# Altium PCB PCB_BalanceCar_2_2022-06-02.pcbdoc
Units mm, origin at the board's own origin, x right, y up, seen from the top; angles counter-clockwise.
Board outline 106.22 x 122.66 mm, 2 copper layers (Top Layer, Bottom Layer); 22 components, 23 nets, 111 pads, 10 vias.
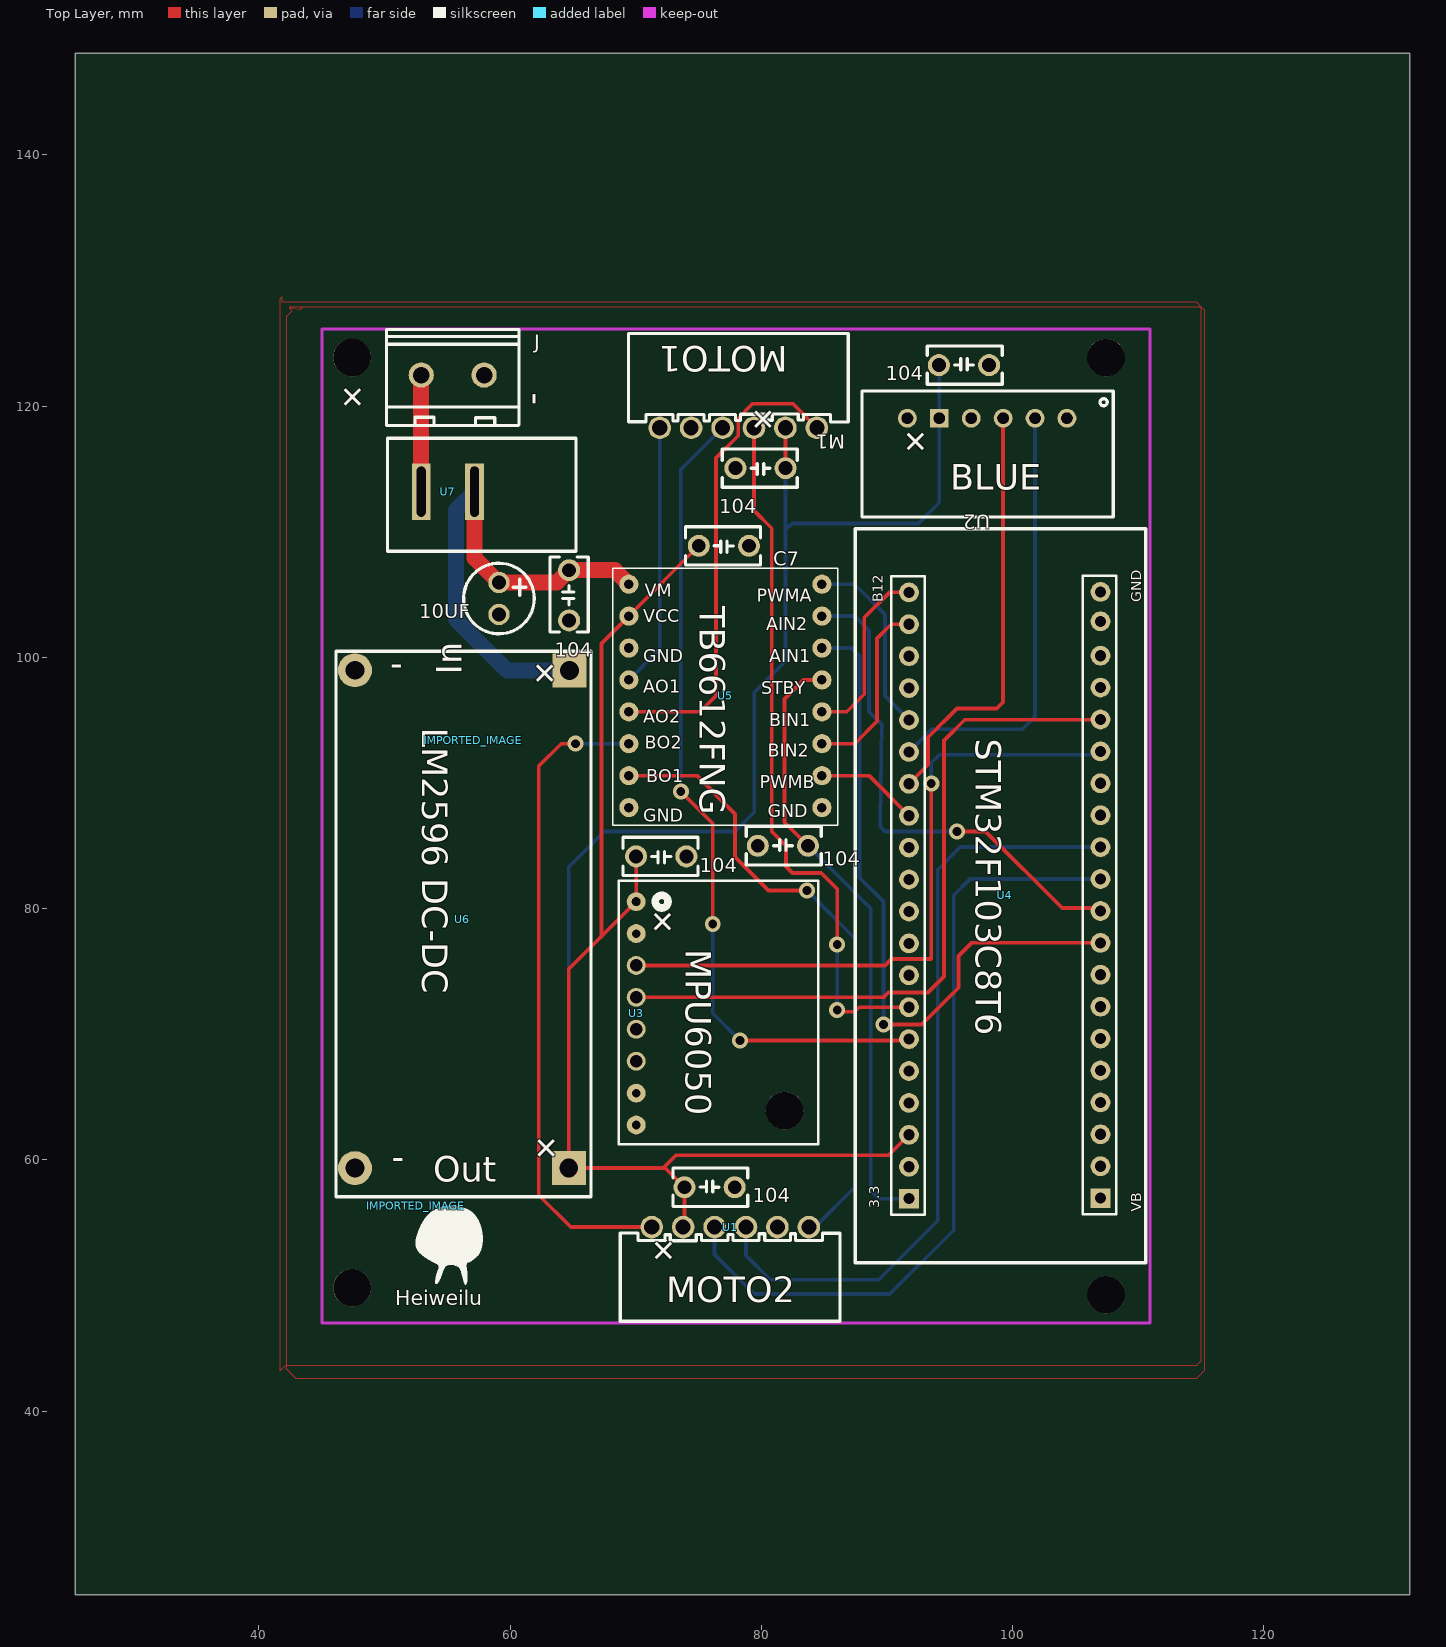
[diagram p0: Top Layer view]
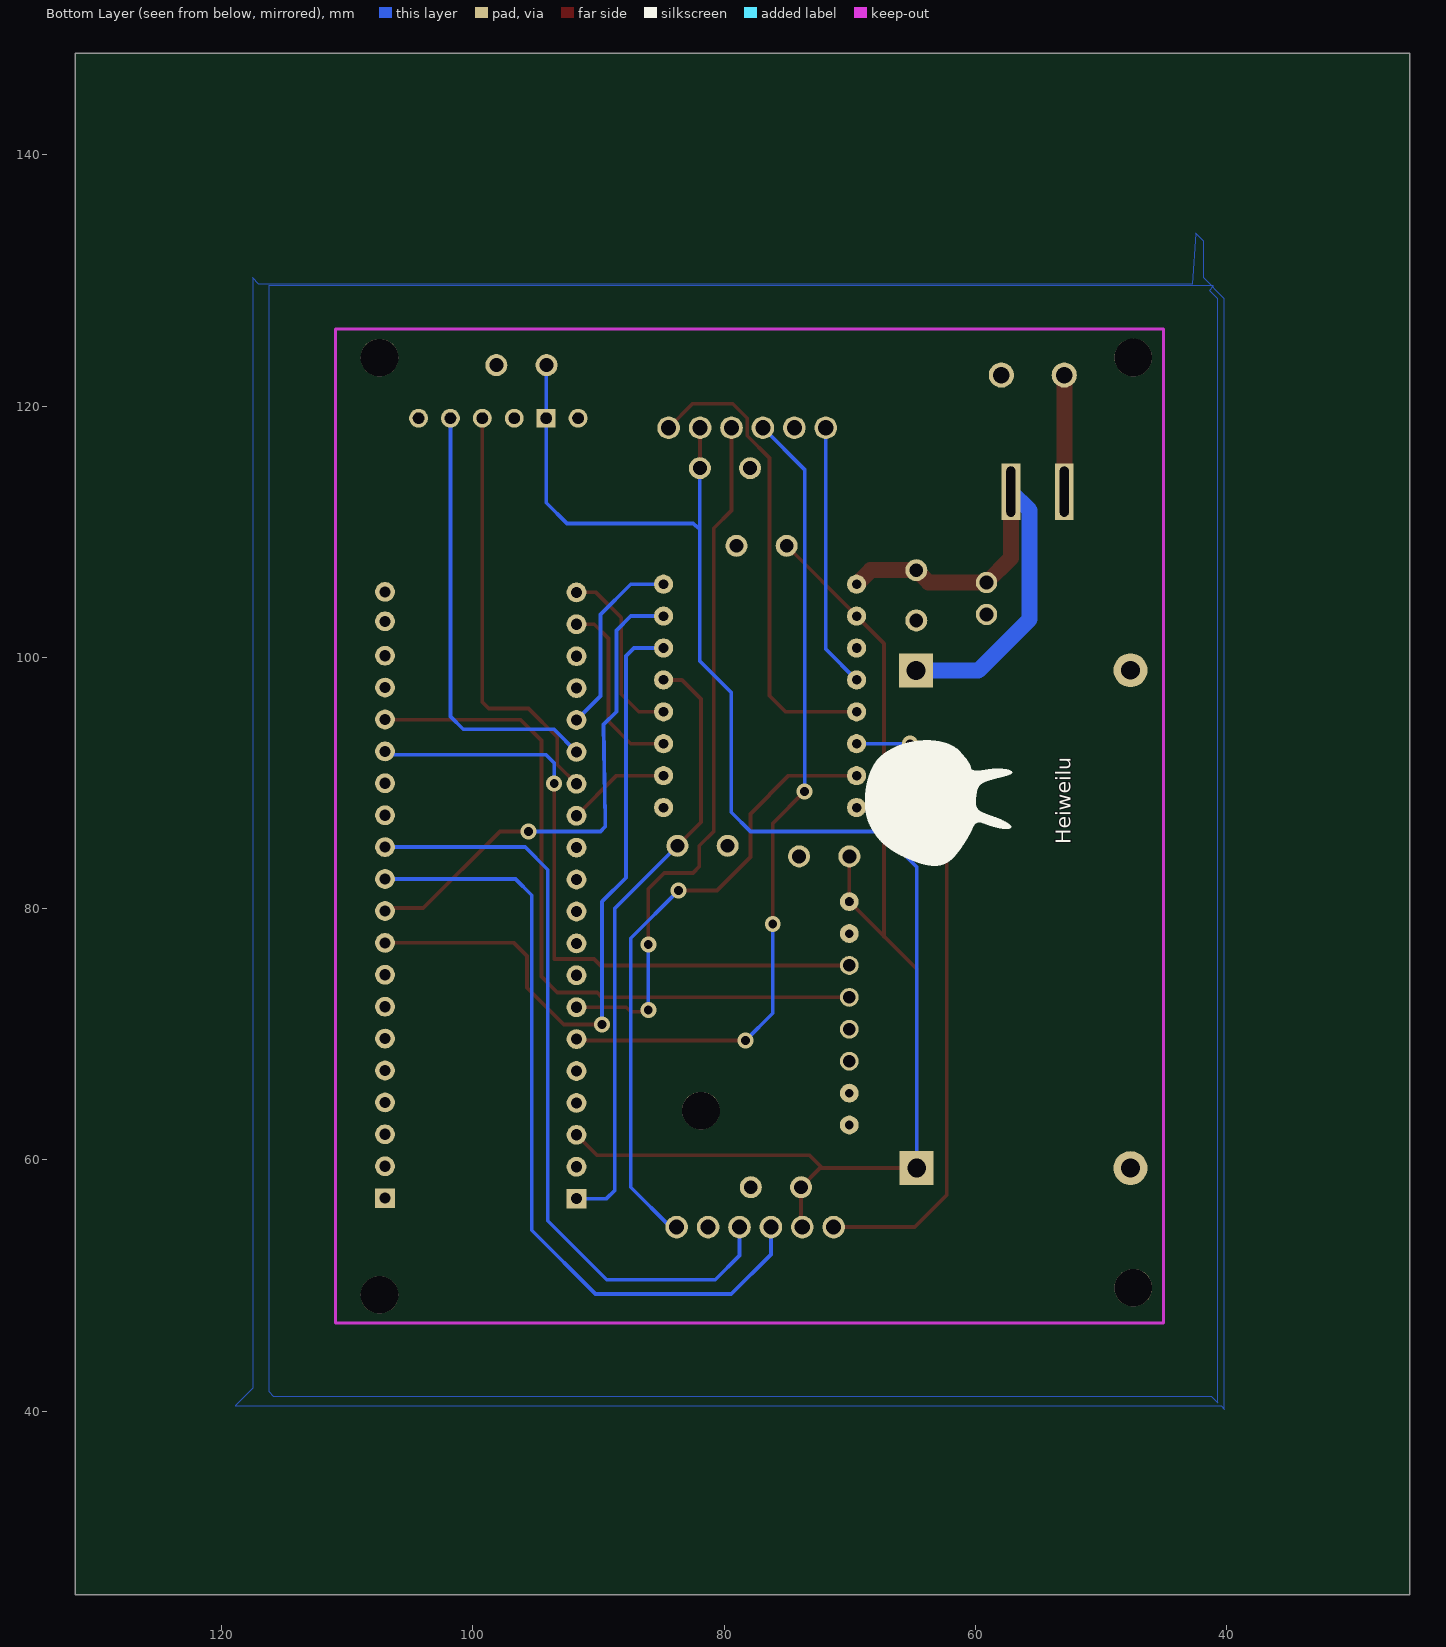
[diagram p1: Bottom Layer view, seen from below]

## Layer stack, top to bottom
Top Layer: signal copper (thickness not stored)
Dielectric: dielectric 0.32, FR-4, Dk 4.8
Bottom Layer: signal copper (thickness not stored)

## Board outline
131.623,25.4 25.4,25.4 25.4,148.062 131.623,148.062

## Components (designator, comment, footprint, x,y, rotation, side; value= is the part's Value field where it differs from the comment)
10UF "10uf" 10UF电解电容 59.106,104.681 r270 top
104 "0.1uf" 104低压瓷片电容（引脚4MM） 79.924,115.055 r0 top
104 "0.1uf" 104低压瓷片电容（引脚4MM） 75.87,57.818 r180 top
104 "0.1uf" 104低压瓷片电容（引脚4MM） 72.024,84.155 r0 top
104 "0.1uf" 104低压瓷片电容（引脚4MM） 96.124,123.255 r180 top
104 "0.1uf" 104低压瓷片电容（引脚4MM） 64.694,104.935 r270 top
104 "0.1uf" 104低压瓷片电容（引脚4MM） 81.712,84.996 r180 top
C7 "0.1uf" 104低压瓷片电容（引脚4MM） 77.013,108.872 r0 top
IMPORTED_IMAGE "IMPORTED_IMAGE" IMPORTED_IMAGE 57.076,93.384 r0 top
IMPORTED_IMAGE "IMPORTED_IMAGE" IMPORTED_IMAGE 52.475,56.339 r0 top
J "电源接口" CONN-TH_2P-P5.00_WJ301V-5.00-2P 55.423,122.461 r180 top
M1 "MOTO1" CONN-TH_XH-6AW 78.156,118.27 r180 top
U1 "MOTO2" CONN-TH_XH-6AW 77.521,54.643 r0 top
U2 "BLUE" 蓝牙 104.318,113.317 r180 top
U3 "MPU6050" MPU6050_____Ģ__ 68.631,61.247 r0 top
U4 "STM32F103C8T6" STM32F103C8T6最小系统 99.365,81.059 r90 top
U5 "TB6612FNG" TB6612FNG 76.817,97.184 r0 top
U6 "LM2596 DC-DC" LM2596-MODULE 56.185,79.154 r270 top
U7 "船型开关" 船型开关 55.042,113.19 r0 top
? "" ? 77.422,129.585 r0 top
? "" ? 42.819,86.858 r0 top
? "" ? 77.422,43.984 r0 top

## Footprints (in the part's own frame and the unit in brackets; to place one, negate y for a bottom-side part, rotate by r counter-clockwise, add the part's x,y. Pads: shape width x height; smd on the part's side, far side on the other; paste and mask are expansions set on the pad)
10UF电解电容 [mm]
  round 1.7 hole 1.1: 1(-1.27,0) 2(1.27,0)
  silkscreen extent -2.81,-2.81 2.81,2.81
104低压瓷片电容（引脚4MM） [mm]
  round 1.75 hole 1.1: 1(-2,0) 2(2,0)
  silkscreen extent -3.05,-1.52 2.92,1.52
CONN-TH_2P-P5.00_WJ301V-5.00-2P [mm]
  round 2 hole 1.3: 1(-2.504,0) 2(2.504,0)
  silkscreen extent -5.27,-3.62 5.26,4.01
CONN-TH_XH-6AW [mm]
  round 1.8 hole 1.199: 1(6.251,0) 2(3.749,0) 3(1.25,0) 4(-1.25,0) 5(-3.749,0) 6(-6.251,0)
  silkscreen extent -8.76,-7.49 8.73,-0.46
IMPORTED_IMAGE [mm]
LM2596-MODULE [mm]
  rect 2.7x2.7 hole 1.5: 1(-19.784,8.54) 3(19.814,8.481)
  round 2.7 hole 1.5: 2(-19.815,-8.54) 4(19.815,-8.535)
  silkscreen extent -21.33,-10.06 22.1,10.26
MPU6050_____Ģ__ [mm]
  round 1.5 hole 0.68 slot 0.685 at 90 deg: 1(1.397,19.304)
  round 1.5 hole 0.68: 2(1.397,16.764) 7(1.397,4.064) 8(1.397,1.524)
  round 1.5 hole 1: 3(1.397,14.224) 4(1.397,11.684) 5(1.397,9.144) 6(1.397,6.604)
  silkscreen extent 0,0 15.88,20.95
STM32F103C8T6最小系统 [mil]
  round 62 hole 35: 1(949.2,300) 2(849.2,300) 3(749.2,300) 4(649.2,300) 5(549.2,300) 6(449.2,300) 7(349.2,300) 8(249.2,300) 9(149.2,300) 10(49.2,300) 11(-50.8,300) 12(-150.8,300) 13(-250.8,300) 14(-350.8,300) 15(-450.8,300) 16(-550.8,300) 17(-650.8,300) 18(-750.8,300) 19(-850.8,300) 22(-849.2,-300) 23(-749.2,-300) 24(-649.2,-300) 25(-549.2,-300) 26(-449.2,-300) 27(-349.2,-300) 28(-249.2,-300) 29(-149.2,-300) 30(-49.2,-300) 31(50.8,-300) 32(150.8,-300) 33(250.8,-300) 34(350.8,-300) 35(450.8,-300) 36(550.8,-300) 37(650.8,-300) 38(750.8,-300) 39(858.4,-300) 40(950.8,-300)
  rect 62x62 hole 35: 20(-950.8,300) 21(-949.2,-300)
  silkscreen extent -1152,-442 1148,468
TB6612FNG [mil]
  round 60 hole 30: 1(-290,340) 2(-290,240) 3(-290,140) 4(-290,40) 5(-290,-60) 6(-290,-160) 7(-290,-260) 8(-290,-360) 9(315,-360) 10(315,-260) 11(315,-160) 12(315,-60) 13(315,40) 14(315,140) 15(315,240) 16(315,340)
  silkscreen extent -340,-415 365,390
船型开关 [mm]
  rect 1.5x4.5 hole 0.7 slot 4 at 90 deg: 1(-2.125,0) 2(2.125,0)
  silkscreen extent -4.8,-4.75 10.2,4.25
蓝牙 [mm]
  round 1.5 hole 0.9 slot 0.905 at 0 deg: 1(0,-5.715) 2(2.54,-5.715) 3(5.08,-5.715) 4(7.62,-5.715) 6(12.7,-5.715)
  rect 1.5x1.5 hole 0.9 slot 0.905 at 0 deg: 5(10.16,-5.715)
  silkscreen extent -3.68,-7.87 16.32,2.16
? [mm]

## Free pads (board coordinates)
  round 3 hole 3 unplated: ""(47.422,49.817) ""(47.422,123.858) ""(81.839,63.914) ""(107.424,49.255) ""(107.424,123.855)

## Via types
v1: diameter 1.27, hole 0.7, Top Layer to Bottom Layer, tented both sides, 10 vias

## Nets (pads, with @x,y where several pads share a name; then routed paths per layer and width w, separated by ;. In a path a pad name is that pad's centre, name@x,y a point inside that pad or via, vN(x,y) a via of type N, cw(c..) or ccw(c..) an arc to the next point about the centre after c; other vN are vias at no path point)
3.3V: 104.1@83.712,84.996 U4.20 U5.13 | length 48.9
  Top Layer w0.3: 104.1@83.711,84.996 81.839,86.868 81.839,96.68 83.358,98.199 U5.13
  Bottom Layer w0.3: 104.1@83.712,84.996 88.697,80.011 88.697,57.564 89.352,56.909 U4.20
+5V: 104.1@70.024,84.155 104.2@73.87,57.818 104.2@81.924,115.055 104.2@94.124,123.255 C7.1 M1.5 U1.5 U2.5 U3.1 U4.18 U5.2 U6.3 | length 191.6
  Top Layer w0.3: U6.3 72.349,59.34 104.2@73.871,57.818 ; U6.3 64.666,75.19 U3.1 70.028,84.152 104.1@70.024,84.155 ; 67.259,77.783 67.259,101.087 U5.2 ; U5.2 69.45,103.31 C7.1 ; 72.187,59.342 72.184,59.34 73.203,60.358 90.114,60.358 U4.18 ; U1.5 73.87,54.741 104.2@73.87,57.818 ; M1.5@81.924,118.255 81.924,115.041 104.2@81.943,115.041
  Bottom Layer w0.3: U6.3 64.666,83.318 67.488,86.139 77.902,86.139 79.426,87.663 79.426,97.188 81.925,99.688 104.2@81.925,115.055 ; 81.925,109.954 81.925,110.231 82.474,110.65 92.507,110.65 94.158,112.301 U2.5 94.158,123.221 104.2@94.124,123.255
AO1: M1.1 U5.4 | length 21.1
  Bottom Layer w0.3: U5.4 71.905,100.654 M1.1
AO2: M1.6 U5.5 | length 37.8
  Top Layer w0.3: U5.5 75.103,95.659 76.378,96.934 76.378,115.857 78.156,117.635 78.156,119.032 79.299,120.175 82.502,120.175 M1.6
BAT+: J.2 U7.1 | length 9.3
  Top Layer w1.27: U7.1 52.917,122.46 J.2
BO1: U1.1 U5.7 | length 50.1
  Top Layer w0.3: U5.7 74.859,90.579 77.902,87.536 77.902,84.107 80.569,81.44 v1(83.617,81.44)
  Bottom Layer w0.3: v1(83.617,81.44) 87.427,77.63 87.427,57.818 84.252,54.643 U1.1
BO2: U1.6 U5.6 | length 52.5
  Top Layer w0.3: v1@64.821,92.997 64.948,93.124 v1(65.202,93.124) 64.059,93.124 62.281,91.346 62.281,57.183 64.821,54.643 U1.6
  Bottom Layer w0.3: v1(65.202,93.124) 69.45,93.124 U5.6
GND: 10UF.2 104.1@77.87,57.818 104.1@77.924,115.055 104.1@98.124,123.255 104.2@64.694,102.936 104.2@74.024,84.155 104.2@79.712,84.996 C7.2 J.1 M1.2 U1.2 U2.4 U3.2 U4.19 U5.8 U6.2 U6.4
PA4: U4.29 U5.14 | length 54.8
  Top Layer w0.3: v1(89.713,70.772) 92.761,70.772 95.682,73.693 95.682,76.233 96.718,77.27 U4.29
  Bottom Layer w0.3: U5.14 87.178,100.739 87.808,100.109 87.808,82.456 89.713,80.551 v1(89.713,70.772)
PA5: U4.30 U5.15 | length 40.6
  Top Layer w0.3: v1(95.555,86.139) 97.841,86.139 103.937,80.043 106.751,80.043 U4.30
  Bottom Layer w0.3: U5.15 87.432,103.279 88.57,102.141 88.57,95.664 89.586,94.648 89.459,87.028 89.459,86.52 89.84,86.139 v1(95.555,86.139)
PA6: U1.4 U4.31 | length 63.5
  Bottom Layer w0.3: U1.4 76.271,52.464 79.426,49.309 90.221,49.309 95.301,54.389 95.301,81.059 96.591,82.35 U4.31
PA7: U1.3 U4.32 | length 61.9
  Bottom Layer w0.3: U1.3 78.77,52.378 80.696,50.452 89.332,50.452 94.031,55.151 94.031,83.091 95.829,84.89 U4.32
PA9: U2.2 U4.6 | length 34.9
  Bottom Layer w0.3: U4.6 93.543,94.267 100.762,94.267 101.778,95.283 U2.2
PA10: U2.3 U4.7 | length 34.1
  Top Layer w0.3: U4.7 93.269,91.453 93.269,93.632 95.555,95.918 98.73,95.918 99.238,96.426 U2.3
PB6: M1.4 U4.14 | length 56.6
  Top Layer w0.3: M1.4 79.405,111.687 80.823,110.269 80.823,86.139 81.966,84.996 81.966,83.345 82.474,82.837 84.76,82.837 86.03,81.567 v1(86.03,77.145) v1@86.03,76.868 ; v1(86.03,71.915) 86.157,71.788 87.427,71.788 87.787,72.149 U4.14
  Bottom Layer w0.3: v1(86.03,71.915) v1@86.03,77.122
PB7: M1.3 U4.15 | length 65.6
  Top Layer w0.3: v1(73.584,89.314) 76.124,86.774 v1(76.124,78.773) ; v1(78.283,69.502) 91.638,69.502 U4.15
  Bottom Layer w0.3: v1(73.584,89.314) 73.584,114.948 M1.3 ; v1(76.124,78.773) 76.124,71.661 v1(78.283,69.502)
PB10: U3.3 U4.35 | length 53.2
  Top Layer w0.3: U3.3 89.84,75.471 90.348,75.979 93.523,75.979 v1(93.523,89.949)
  Bottom Layer w0.3: v1(93.523,89.949) 93.523,91.6 94.158,92.235 106.71,92.235 U4.35
PB11: U3.4 U4.36 | length 57.1
  Top Layer w0.3: U3.4 89.713,72.931 90.094,73.312 93.269,73.312 94.539,74.582 94.539,93.378 96.19,95.029 U4.36
PB12: U4.1 U5.12 | length 14.4
  Top Layer w0.3: U5.12 86.787,95.659 88.189,97.061 88.189,103.157 90.2,105.169 U4.1
PB13: U4.2 U5.11 | length 14.7
  Top Layer w0.3: U5.11 87.422,93.119 89.205,94.902 89.205,101.506 90.327,102.629 U4.2
PWMA: U4.5 U5.16 | length 15.2
  Bottom Layer w0.3: U5.16 87.432,105.819 89.84,103.411 89.84,96.914 U4.5
PWMB: U4.8 U5.10 | length 8.2
  Top Layer w0.3: U5.10 88.555,90.579 U4.8
VM: 10UF.1 104.1@64.694,106.936 U5.1 U6.1 U7.2 | length 40.8
  Top Layer w1.27: U7.2 57.167,107.891 10UF.1 63.711,105.952 64.694,106.935 68.335,106.935 U5.1
  Bottom Layer w1.27: U7.2 55.677,111.699 55.677,103.03 59.769,98.939 U6.1@64.727,98.939
pads on no net: U2.1 U2.6 U3.5 U3.6 U3.7 U3.8 U4.3 U4.4 U4.9 U4.10 U4.11 U4.12 U4.13 U4.16 U4.17 U4.21 U4.22 U4.23 U4.24 U4.25 U4.26 U4.27 U4.28 U4.33 U4.34 U4.37 U4.38 U4.39 U4.40 U5.3 U5.9

## Polygon pours and split planes (outlines as drawn)
GND on Bottom Layer (solid): 42.723,129.7 117.018,129.7 117.526,130.208 117.526,41.816 118.923,40.419 40.437,40.419 40.183,40.165 40.183,128.557 41.834,130.208 41.834,133.129 42.469,133.764
GND on Bottom Layer (solid): 41.072,129.573 116.256,129.573 116.256,41.562 115.875,41.181 41.199,41.181 40.691,40.673 40.691,128.557 41.326,129.192
GND on Top Layer (solid): 43.485,127.922 43.247,127.684 42.469,127.795 42.596,127.922 43.485,127.922
GND on Top Layer (solid): 42.469,127.922 114.986,127.922 115.24,127.668 115.24,43.213 114.605,42.578 42.977,42.578 42.215,43.34 42.215,127.16 42.596,127.541
GND on Top Layer (solid): 41.834,128.303 114.605,128.303 114.986,127.922 114.986,43.975 114.605,43.594 42.088,43.594 41.707,43.213 41.707,128.557 41.834,128.684

## Silkscreen, mask and mechanical layers (free items; w line width, h text height)
Top Overlay:
  text "MOTO1" at 82.093,124.747 h2.03 r180
  text "+" at 48.902,120.513 h2.03 r135
  text "+" at 80.358,120.386 h2.03 r225
  text "-" at 62.662,120.048 h2.03 r90
  text "+" at 93.733,116.957 h2.03 r135
  text "BLUE" at 95.047,113.317 h2.03
  text "TB6612FNG" at 75.108,104.046 h2.03 r270
  text "LM2596 DC-DC" at 53.01,94.394 h2.03 r270
  text "STM32F103C8T6" at 97.079,93.505 h2.03 r270
  text "+" at 72.357,80.381 h2.03 r225
  text "MPU6050" at 73.965,76.741 h2.03 r270
  text "+" at 73.667,52.568 h2.03 r135
  text "MOTO2" at 72.441,48.674 h2.03
  text "Heiweilu" at 50.851,48.039 h2.03
Bottom Overlay:
  text "Heiweilu" at 51.994,85.123 h2.03 r270

## Text inside footprints (layer, text, board x,y; h text height)
U4: Top Overlay "3.3" at 89.394,56.127 h0.8 r90; Top Overlay "VB" at 110.222,55.873 h0.8 r90; Top Overlay "B12" at 89.648,104.387 h0.8 r90; Top Overlay "GND" at 110.222,104.387 h0.8 r90
U5: Top Overlay "BO1" at 70.847,90.072 h1.02; Top Overlay "BO2" at 70.72,92.739 h1.02; Top Overlay "VM" at 70.72,104.804 h1.02; Top Overlay "AIN2" at 80.372,102.137 h1.02; Top Overlay "AIN1" at 80.626,99.597 h1.02; Top Overlay "BIN1" at 80.626,94.517 h1.02; Top Overlay "BIN2" at 80.499,92.104 h1.02; Top Overlay "PWMB" at 79.864,89.564 h1.02; Top Overlay "GND" at 80.499,87.278 h1.02; Top Overlay "GND" at 70.593,86.897 h1.02; Top Overlay "AO1" at 70.593,97.184 h1.02; Top Overlay "GND" at 70.593,99.597 h1.02; Top Overlay "VCC" at 70.593,102.772 h1.02; Top Overlay "STBY" at 79.991,97.057 h1.02; Top Overlay "AO2" at 70.593,94.771 h1.02; Top Overlay "PWMA" at 79.61,104.423 h1.02
U6: Top Overlay "+" at 62.653,59.47 h2.03 r45; Top Overlay "+" at 61.328,98.931 h2.03 r315; Top Overlay "-" at 50.466,98.542 h2.03; Top Overlay "-" at 50.586,59.231 h2.03; Top Overlay "In" at 56.13,98.629 h2.03 r90; Top Overlay "Out" at 53.875,58.243 h2.03